# EAGLE board microconnectorV2-straight (EAGLE 6.6.0)
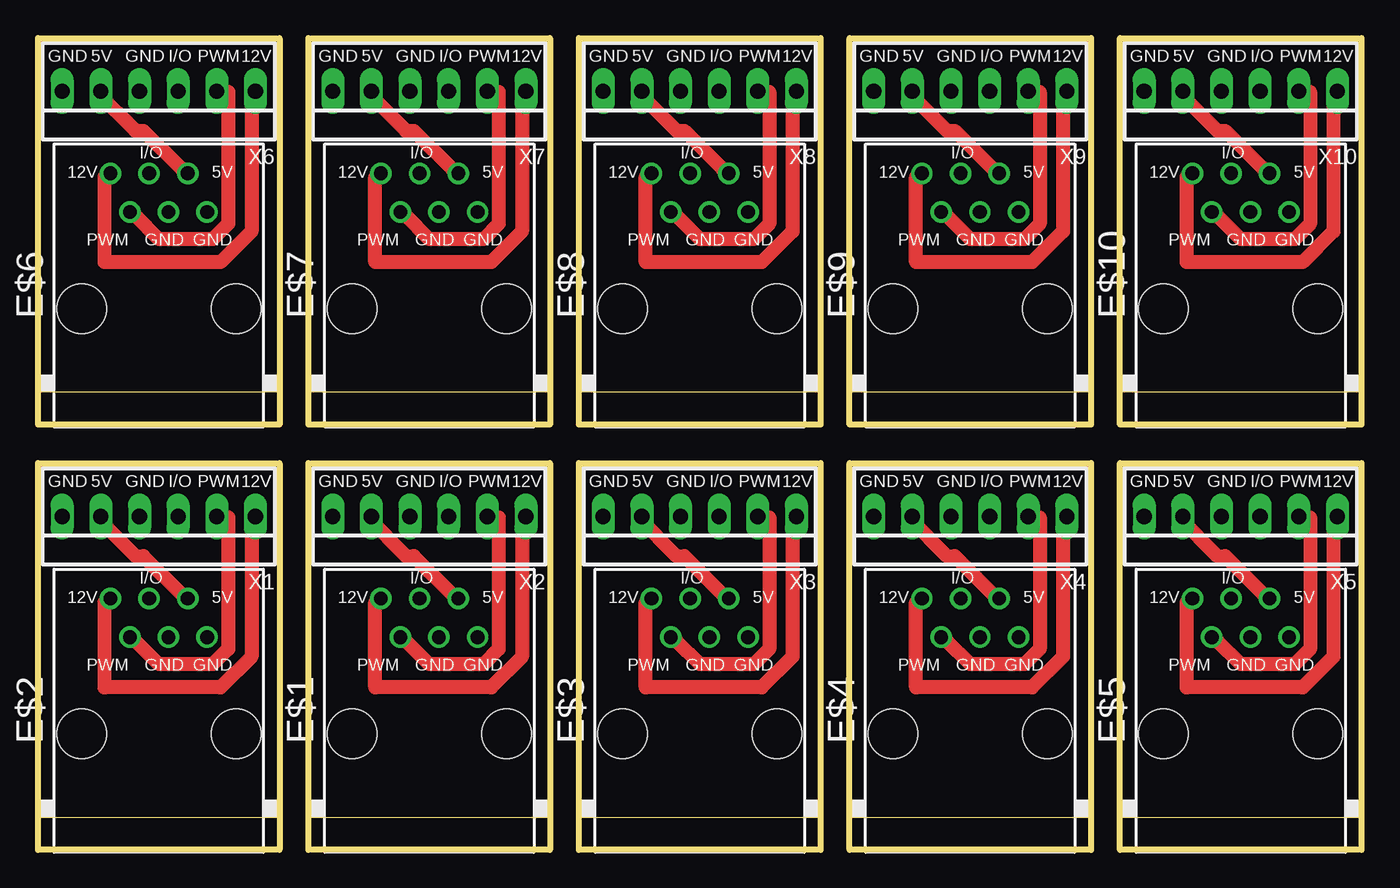
[diagram p0: board, top side]
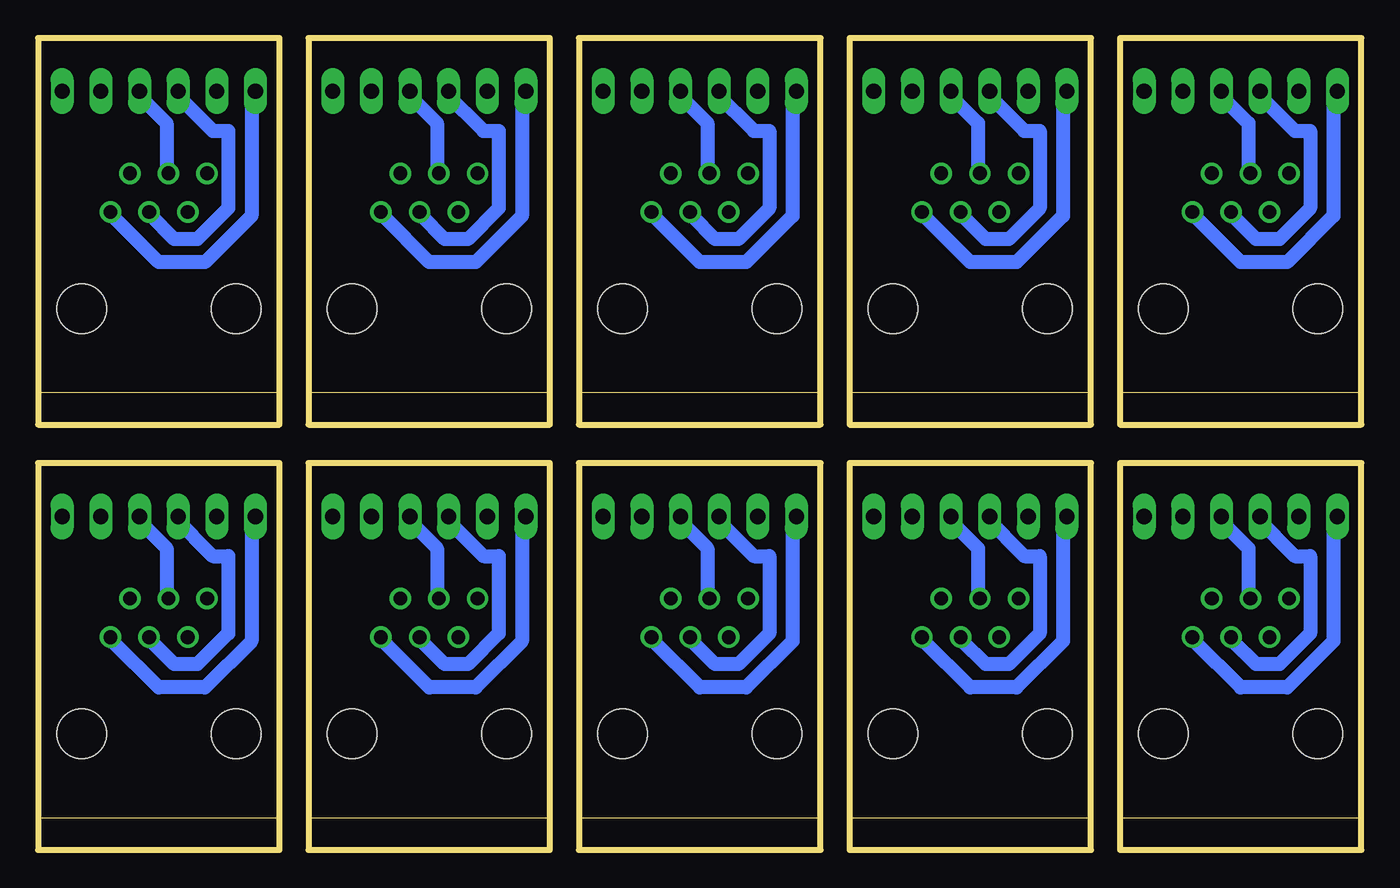
[diagram p1: board, bottom side, seen from below]

Size 86.99 x 53.34 mm. Coordinates in mm from the lower left corner, seen from the top.
Outline: 0,25.4 15.87,25.4 15.87,0 0,0 0,25.4
Outline: 17.78,25.4 33.65,25.4 33.65,0 17.78,0 17.78,25.4
Outline: 35.56,25.4 51.43,25.4 51.43,0 35.56,0 35.56,25.4
Outline: 53.34,25.4 69.21,25.4 69.21,0 53.34,0 53.34,25.4
Outline: 71.12,25.4 86.99,25.4 86.99,0 71.12,0 71.12,25.4
Outline: 0,53.34 15.87,53.34 15.87,27.94 0,27.94 0,53.34
Outline: 17.78,53.34 33.65,53.34 33.65,27.94 17.78,27.94 17.78,53.34
Outline: 35.56,53.34 51.43,53.34 51.43,27.94 35.56,27.94 35.56,53.34
Outline: 53.34,53.34 69.21,53.34 69.21,27.94 53.34,27.94 53.34,53.34
Outline: 71.12,53.34 86.99,53.34 86.99,27.94 71.12,27.94 71.12,53.34
Copper layers (1*16): Top 0.035mm / dielectric 1.5mm / Bottom 0.035mm
Design rules "default": minimum track width 10mil, minimum drill 24mil, track to track 8mil, track to pad 8mil, pad to pad 8mil, via to via 8mil, smd to smd 8mil, copper to edge 40mil, drill to drill 8mil, minimum pad ring 10mil, minimum via ring 8mil, stop-mask expansion 4mil, vias tented up to drill 0mil, thermal gap 10mil
Net classes: 0 default: width 0.914 mm; 1 power: width 0.914 mm
Milling: 40 lines

## Footprints (pad centres in the part's own frame; a part is rotated, then mirrored left to right if it is on the bottom)
RJ12-STRAIGHT = drill 0.9 pad 1.4: +5V 1.905,8.89; +12V -3.175,8.89; GND1 3.175,6.35; GND2 0.635,6.35; I/O -0.635,8.89; PWM -1.905,6.35 | hole 3.251: -5.08,0; 5.08,0
22-23-2061 = drill 1 long: 1 -6.35,0; 2 -3.81,0; 3 -1.27,0; 4 1.27,0; 5 3.81,0; 6 6.35,0

## Placement (x,y rotation side)
E$1  [RJ12-STRAIGHT]  25.72,7.62 0 top
E$2  [RJ12-STRAIGHT]  7.94,7.62 0 top
E$3  [RJ12-STRAIGHT]  43.5,7.62 0 top
E$4  [RJ12-STRAIGHT]  61.28,7.62 0 top
E$5  [RJ12-STRAIGHT]  79.06,7.62 0 top
E$6  [RJ12-STRAIGHT]  7.94,35.56 0 top
E$7  [RJ12-STRAIGHT]  25.72,35.56 0 top
E$8  [RJ12-STRAIGHT]  43.5,35.56 0 top
E$9  [RJ12-STRAIGHT]  61.28,35.56 0 top
E$10  [RJ12-STRAIGHT]  79.06,35.56 0 top
X1  [22-23-2061]  7.94,21.91 180 top
X2  [22-23-2061]  25.72,21.91 180 top
X3  [22-23-2061]  43.5,21.91 180 top
X4  [22-23-2061]  61.28,21.91 180 top
X5  [22-23-2061]  79.06,21.91 180 top
X6  [22-23-2061]  7.94,49.85 180 top
X7  [22-23-2061]  25.72,49.85 180 top
X8  [22-23-2061]  43.5,49.85 180 top
X9  [22-23-2061]  61.28,49.85 180 top
X10  [22-23-2061]  79.06,49.85 180 top

## Library data of the parts
E$1-E$10 = lpatiny
X1-X10 = con-molex; MF: MOLEX; MPN: 22-23-2061; OC_FARNELL: 1462922; OC_NEWARK: 27C1933

## Nets
S$1: E$2.GND1 X1.6
S$2: E$2.+5V X1.5
S$3: E$2.GND2 X1.4
S$4: E$2.I/O X1.3
S$5: E$2.PWM X1.2
S$6: E$2.+12V X1.1
S$7: E$1.GND1 X2.6
S$8: E$1.+5V X2.5
S$9: E$1.GND2 X2.4
S$10: E$1.I/O X2.3
S$11: E$1.PWM X2.2
S$12: E$1.+12V X2.1
S$13: E$3.GND1 X3.6
S$14: E$3.+5V X3.5
S$15: E$3.GND2 X3.4
S$16: E$3.I/O X3.3
S$17: E$3.PWM X3.2
S$18: E$3.+12V X3.1
S$19: E$4.GND1 X4.6
S$20: E$4.+5V X4.5
S$21: E$4.GND2 X4.4
S$22: E$4.I/O X4.3
S$23: E$4.PWM X4.2
S$24: E$4.+12V X4.1
S$25: E$5.GND1 X5.6
S$26: E$5.+5V X5.5
S$27: E$5.GND2 X5.4
S$28: E$5.I/O X5.3
S$29: E$5.PWM X5.2
S$30: E$5.+12V X5.1
S$31: E$6.GND1 X6.6
S$32: E$6.+5V X6.5
S$33: E$6.GND2 X6.4
S$34: E$6.I/O X6.3
S$35: E$6.PWM X6.2
S$36: E$6.+12V X6.1
S$37: E$7.GND1 X7.6
S$38: E$7.+5V X7.5
S$39: E$7.GND2 X7.4
S$40: E$7.I/O X7.3
S$41: E$7.PWM X7.2
S$42: E$7.+12V X7.1
S$43: E$8.GND1 X8.6
S$44: E$8.+5V X8.5
S$45: E$8.GND2 X8.4
S$46: E$8.I/O X8.3
S$47: E$8.PWM X8.2
S$48: E$8.+12V X8.1
S$49: E$9.GND1 X9.6
S$50: E$9.+5V X9.5
S$51: E$9.GND2 X9.4
S$52: E$9.I/O X9.3
S$53: E$9.PWM X9.2
S$54: E$9.+12V X9.1
S$55: E$10.GND1 X10.6
S$56: E$10.+5V X10.5
S$57: E$10.GND2 X10.4
S$58: E$10.I/O X10.3
S$59: E$10.PWM X10.2
S$60: E$10.+12V X10.1

## Tracks (layer width: path | path; a pad name or v marks a point on that pad's centre or on a via)
S$1
  Bottom 0.914: E$2.GND1 10.99,13.72 7.94,10.67 4.89,10.67 1.84,13.72 1.84,21.84 X1.6
S$2
  Top 0.914: E$2.+5V 9.46,16.76 6.92,19.3 6.41,19.3 3.87,21.84 X1.5
S$3
  Bottom 0.914: E$2.GND2 8.45,13.72 6.92,12.19 5.4,12.19 3.37,14.22 3.37,19.3 4.38,19.3 6.92,21.84 X1.4
S$4
  Bottom 0.914: E$2.I/O 7.43,16.76 7.43,19.81 9.46,21.84 X1.3
S$5
  Top 0.914: E$2.PWM 6.41,13.72 7.94,12.19 11.49,12.19 12.51,13.21 12.51,21.84 12,21.84 X1.2
S$6
  Top 0.914: E$2.+12V 4.38,16.26 4.38,10.67 12,10.67 14.03,12.7 14.03,21.84 X1.1
S$7
  Bottom 0.914: E$1.GND1 28.77,13.72 25.72,10.67 22.67,10.67 19.62,13.72 19.62,21.84 X2.6
S$8
  Top 0.914: E$1.+5V 27.24,16.76 24.7,19.3 24.19,19.3 21.65,21.84 X2.5
S$9
  Bottom 0.914: E$1.GND2 26.23,13.72 24.7,12.19 23.18,12.19 21.15,14.22 21.15,19.3 22.16,19.3 24.7,21.84 X2.4
S$10
  Bottom 0.914: E$1.I/O 25.21,16.76 25.21,19.81 27.24,21.84 X2.3
S$11
  Top 0.914: E$1.PWM 24.19,13.72 25.72,12.19 29.27,12.19 30.29,13.21 30.29,21.84 29.78,21.84 X2.2
S$12
  Top 0.914: E$1.+12V 22.16,16.26 22.16,10.67 29.78,10.67 31.81,12.7 31.81,21.84 X2.1
S$13
  Bottom 0.914: E$3.GND1 46.55,13.72 43.5,10.67 40.45,10.67 37.4,13.72 37.4,21.84 X3.6
S$14
  Top 0.914: E$3.+5V 45.02,16.76 42.48,19.3 41.97,19.3 39.43,21.84 X3.5
S$15
  Bottom 0.914: E$3.GND2 44.01,13.72 42.48,12.19 40.96,12.19 38.93,14.22 38.93,19.3 39.94,19.3 42.48,21.84 X3.4
S$16
  Bottom 0.914: E$3.I/O 42.99,16.76 42.99,19.81 45.02,21.84 X3.3
S$17
  Top 0.914: E$3.PWM 41.97,13.72 43.5,12.19 47.05,12.19 48.07,13.21 48.07,21.84 47.56,21.84 X3.2
S$18
  Top 0.914: E$3.+12V 39.94,16.26 39.94,10.67 47.56,10.67 49.59,12.7 49.59,21.84 X3.1
S$19
  Bottom 0.914: E$4.GND1 64.33,13.72 61.28,10.67 58.23,10.67 55.18,13.72 55.18,21.84 X4.6
S$20
  Top 0.914: E$4.+5V 62.8,16.76 60.26,19.3 59.75,19.3 57.21,21.84 X4.5
S$21
  Bottom 0.914: E$4.GND2 61.79,13.72 60.26,12.19 58.74,12.19 56.71,14.22 56.71,19.3 57.72,19.3 60.26,21.84 X4.4
S$22
  Bottom 0.914: E$4.I/O 60.77,16.76 60.77,19.81 62.8,21.84 X4.3
S$23
  Top 0.914: E$4.PWM 59.75,13.72 61.28,12.19 64.83,12.19 65.85,13.21 65.85,21.84 65.34,21.84 X4.2
S$24
  Top 0.914: E$4.+12V 57.72,16.26 57.72,10.67 65.34,10.67 67.37,12.7 67.37,21.84 X4.1
S$25
  Bottom 0.914: E$5.GND1 82.11,13.72 79.06,10.67 76.01,10.67 72.96,13.72 72.96,21.84 X5.6
S$26
  Top 0.914: E$5.+5V 80.58,16.76 78.04,19.3 77.53,19.3 74.99,21.84 X5.5
S$27
  Bottom 0.914: E$5.GND2 79.57,13.72 78.04,12.19 76.52,12.19 74.49,14.22 74.49,19.3 75.5,19.3 78.04,21.84 X5.4
S$28
  Bottom 0.914: E$5.I/O 78.55,16.76 78.55,19.81 80.58,21.84 X5.3
S$29
  Top 0.914: E$5.PWM 77.53,13.72 79.06,12.19 82.61,12.19 83.63,13.21 83.63,21.84 83.12,21.84 X5.2
S$30
  Top 0.914: E$5.+12V 75.5,16.26 75.5,10.67 83.12,10.67 85.15,12.7 85.15,21.84 X5.1
S$31
  Bottom 0.914: E$6.GND1 10.99,41.66 7.94,38.61 4.89,38.61 1.84,41.66 1.84,49.78 X6.6
S$32
  Top 0.914: E$6.+5V 9.46,44.7 6.92,47.24 6.41,47.24 3.87,49.78 X6.5
S$33
  Bottom 0.914: E$6.GND2 8.45,41.66 6.92,40.13 5.4,40.13 3.37,42.16 3.37,47.24 4.38,47.24 6.92,49.78 X6.4
S$34
  Bottom 0.914: E$6.I/O 7.43,44.7 7.43,47.75 9.46,49.78 X6.3
S$35
  Top 0.914: E$6.PWM 6.41,41.66 7.94,40.13 11.49,40.13 12.51,41.15 12.51,49.78 12,49.78 X6.2
S$36
  Top 0.914: E$6.+12V 4.38,44.2 4.38,38.61 12,38.61 14.03,40.64 14.03,49.78 X6.1
S$37
  Bottom 0.914: E$7.GND1 28.77,41.66 25.72,38.61 22.67,38.61 19.62,41.66 19.62,49.78 X7.6
S$38
  Top 0.914: E$7.+5V 27.24,44.7 24.7,47.24 24.19,47.24 21.65,49.78 X7.5
S$39
  Bottom 0.914: E$7.GND2 26.23,41.66 24.7,40.13 23.18,40.13 21.15,42.16 21.15,47.24 22.16,47.24 24.7,49.78 X7.4
S$40
  Bottom 0.914: E$7.I/O 25.21,44.7 25.21,47.75 27.24,49.78 X7.3
S$41
  Top 0.914: E$7.PWM 24.19,41.66 25.72,40.13 29.27,40.13 30.29,41.15 30.29,49.78 29.78,49.78 X7.2
S$42
  Top 0.914: E$7.+12V 22.16,44.2 22.16,38.61 29.78,38.61 31.81,40.64 31.81,49.78 X7.1
S$43
  Bottom 0.914: E$8.GND1 46.55,41.66 43.5,38.61 40.45,38.61 37.4,41.66 37.4,49.78 X8.6
S$44
  Top 0.914: E$8.+5V 45.02,44.7 42.48,47.24 41.97,47.24 39.43,49.78 X8.5
S$45
  Bottom 0.914: E$8.GND2 44.01,41.66 42.48,40.13 40.96,40.13 38.93,42.16 38.93,47.24 39.94,47.24 42.48,49.78 X8.4
S$46
  Bottom 0.914: E$8.I/O 42.99,44.7 42.99,47.75 45.02,49.78 X8.3
S$47
  Top 0.914: E$8.PWM 41.97,41.66 43.5,40.13 47.05,40.13 48.07,41.15 48.07,49.78 47.56,49.78 X8.2
S$48
  Top 0.914: E$8.+12V 39.94,44.2 39.94,38.61 47.56,38.61 49.59,40.64 49.59,49.78 X8.1
S$49
  Bottom 0.914: E$9.GND1 64.33,41.66 61.28,38.61 58.23,38.61 55.18,41.66 55.18,49.78 X9.6
S$50
  Top 0.914: E$9.+5V 62.8,44.7 60.26,47.24 59.75,47.24 57.21,49.78 X9.5
S$51
  Bottom 0.914: E$9.GND2 61.79,41.66 60.26,40.13 58.74,40.13 56.71,42.16 56.71,47.24 57.72,47.24 60.26,49.78 X9.4
S$52
  Bottom 0.914: E$9.I/O 60.77,44.7 60.77,47.75 62.8,49.78 X9.3
S$53
  Top 0.914: E$9.PWM 59.75,41.66 61.28,40.13 64.83,40.13 65.85,41.15 65.85,49.78 65.34,49.78 X9.2
S$54
  Top 0.914: E$9.+12V 57.72,44.2 57.72,38.61 65.34,38.61 67.37,40.64 67.37,49.78 X9.1
S$55
  Bottom 0.914: E$10.GND1 82.11,41.66 79.06,38.61 76.01,38.61 72.96,41.66 72.96,49.78 X10.6
S$56
  Top 0.914: E$10.+5V 80.58,44.7 78.04,47.24 77.53,47.24 74.99,49.78 X10.5
S$57
  Bottom 0.914: E$10.GND2 79.57,41.66 78.04,40.13 76.52,40.13 74.49,42.16 74.49,47.24 75.5,47.24 78.04,49.78 X10.4
S$58
  Bottom 0.914: E$10.I/O 78.55,44.7 78.55,47.75 80.58,49.78 X10.3
S$59
  Top 0.914: E$10.PWM 77.53,41.66 79.06,40.13 82.61,40.13 83.63,41.15 83.63,49.78 83.12,49.78 X10.2
S$60
  Top 0.914: E$10.+12V 75.5,44.2 75.5,38.61 83.12,38.61 85.15,40.64 85.15,49.78 X10.1

## Text on the board
tPlace: GND | 5V | GND | I/O | PWM | 12V | GND | 5V | GND | I/O | PWM | 12V | GND | 5V | GND | I/O | PWM | 12V | GND | 5V | GND | I/O | PWM | 12V | GND | 5V | GND | I/O | PWM | 12V | GND | 5V | GND | I/O | PWM | 12V | GND | 5V | GND | I/O | PWM | 12V | GND | 5V | GND | I/O | PWM | 12V | GND | 5V | GND | I/O | PWM | 12V | GND | 5V | GND | I/O | PWM | 12V